# Altium PCB hub.PCBDOC
Units mm, origin at the board's own origin, x right, y up, seen from the top; angles counter-clockwise.
Board outline 100 x 104 mm, 2 copper layers (Top Layer, Bottom Layer); 58 components, 55 nets, 222 pads, 73 vias.
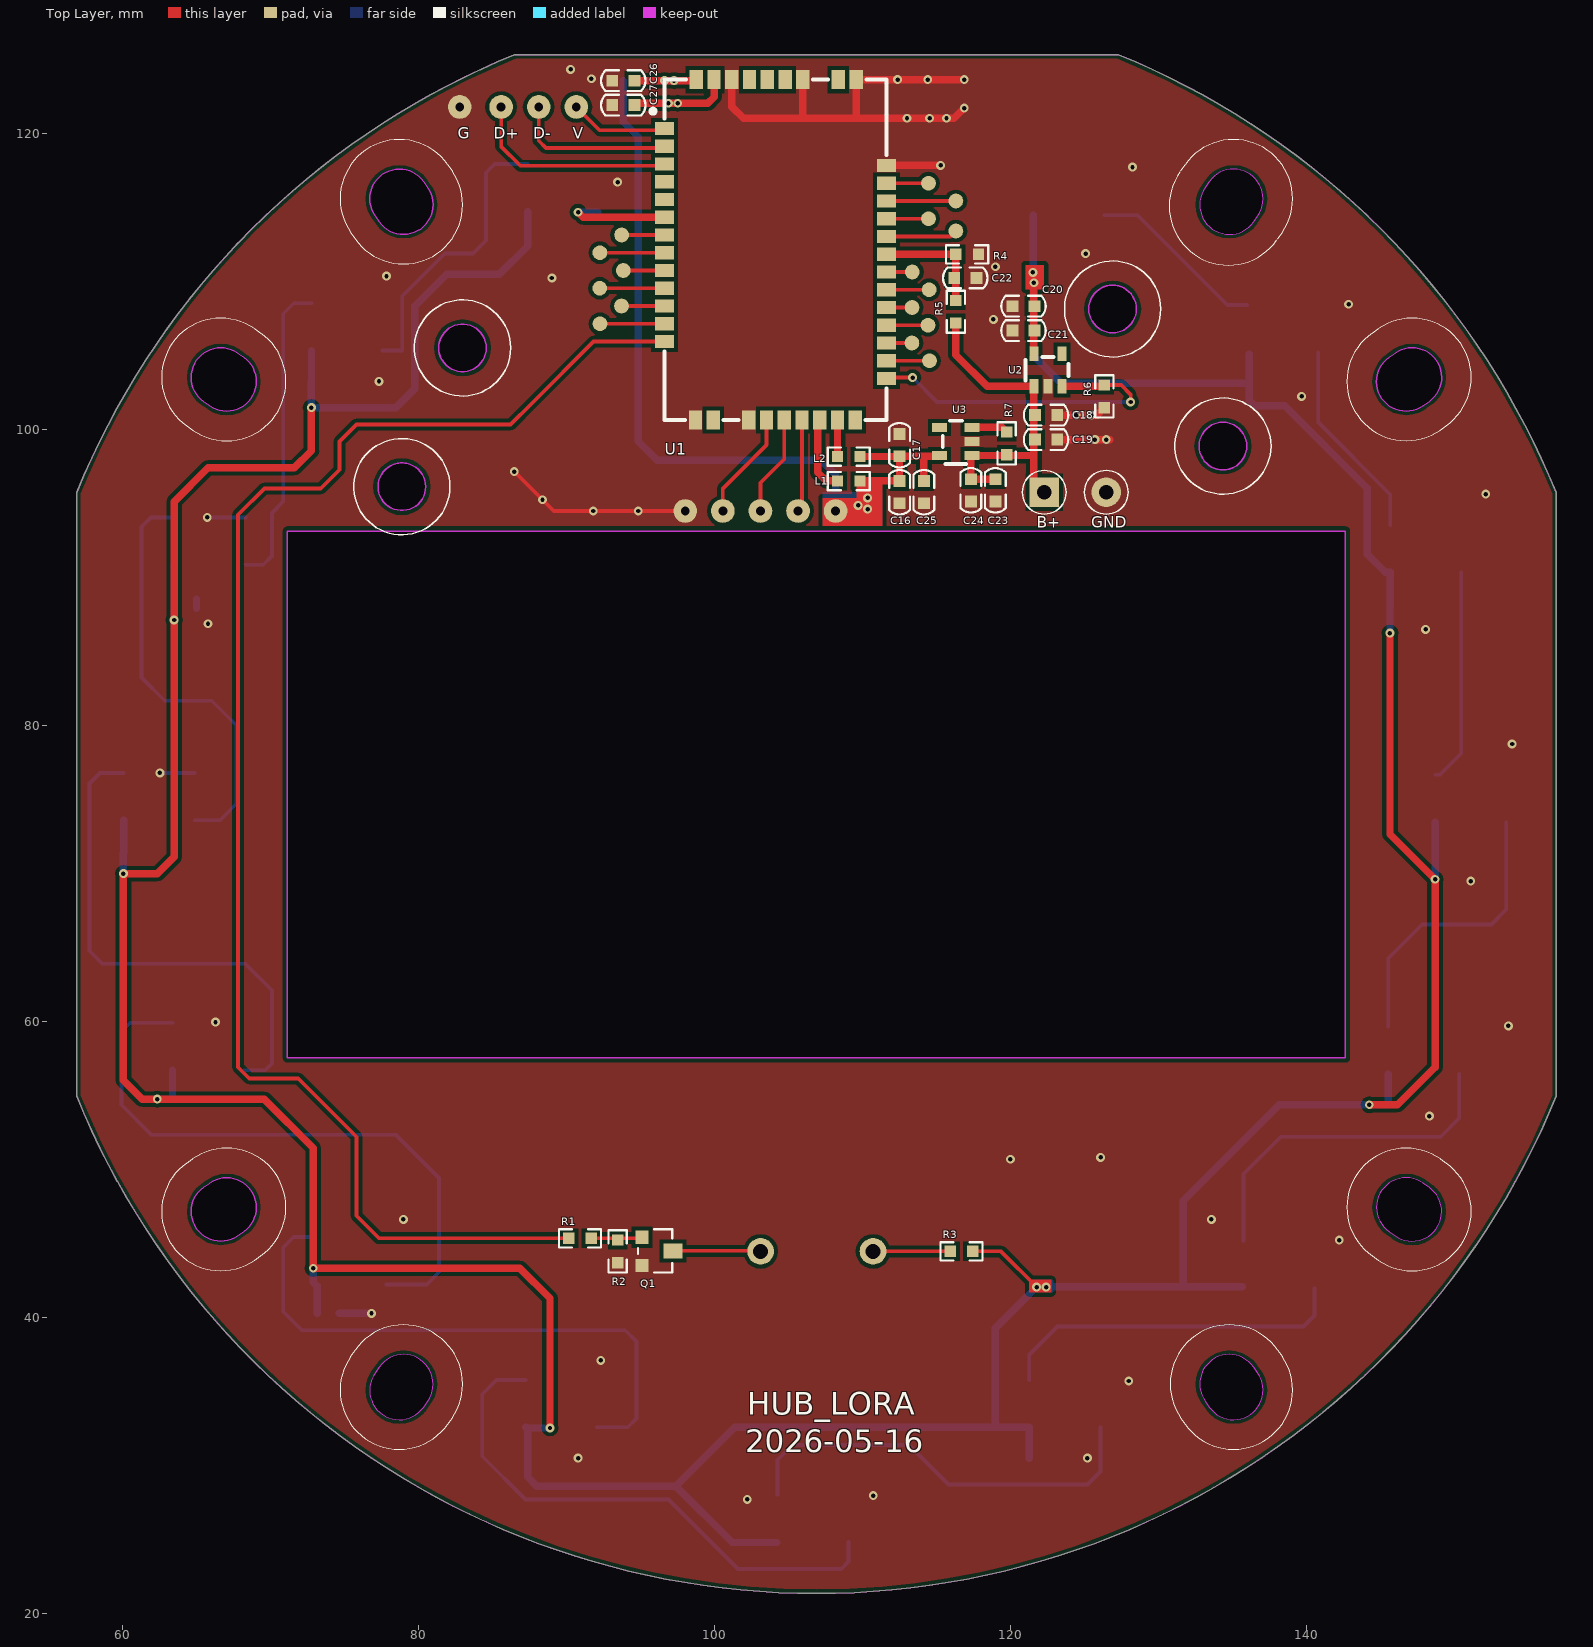
[diagram p0: Top Layer view]
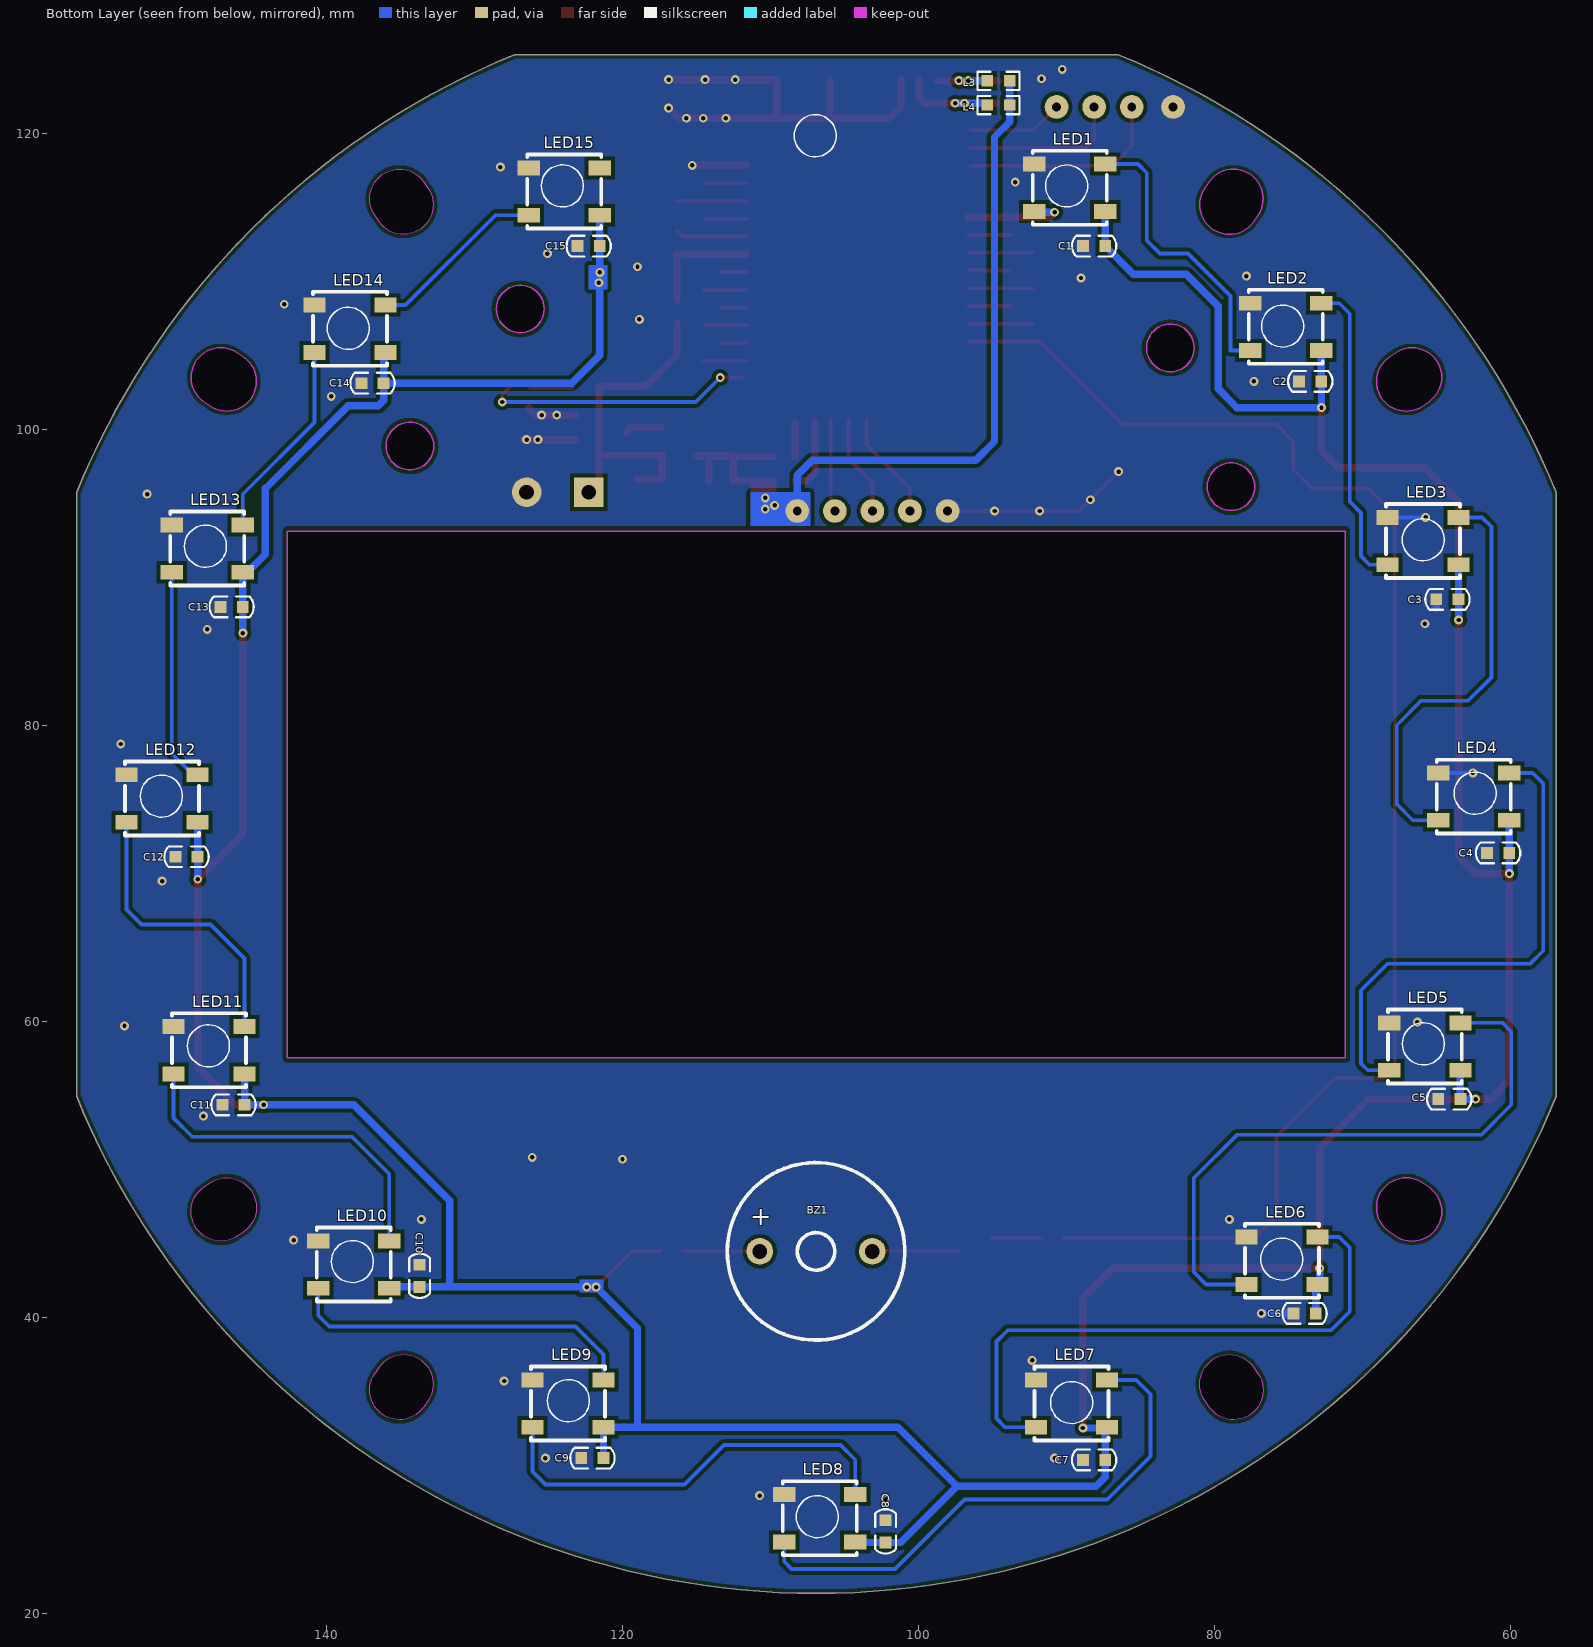
[diagram p1: Bottom Layer view, seen from below]

## Layer stack, top to bottom
Top Layer: signal copper 0.0356
Dielectric: dielectric 0.32, FR-4, Dk 4.8
Bottom Layer: signal copper 0.0356

## Board outline
56.908,54.938 ccw(c106.908,75.334) 156.908,54.938 156.908,95.73 ccw(c106.908,75.334) 127.304,125.334 86.512,125.334 86.51,125.333 ccw(c106.906,75.333) 56.906,95.729 56.908,95.73
cut-out: 71.156,57.533 71.156,93.133 142.656,93.133 142.656,57.533
cut-out: 147.905,101.599 cw(c146.758,103.238) 145.61,104.876 146.02,105.163 cw(c147.167,103.524) 148.314,101.886
cut-out: 133.172,116.332 ccw(c134.81,115.184) 136.448,114.037 136.735,114.447 ccw(c135.097,115.594) 133.458,116.741
cut-out: 77.363,114.038 77.076,114.447 cw(c78.715,115.594) 80.353,116.742 80.64,116.332 cw(c79.001,115.185)
cut-out: 145.61,45.79 146.019,45.503 ccw(c147.167,47.142) 148.314,48.78 147.904,49.067 ccw(c146.757,47.428)
cut-out: 133.172,34.334 133.459,33.925 ccw(c135.097,35.072) 136.735,36.219 136.449,36.629 ccw(c134.81,35.481)
cut-out: 77.076,36.219 ccw(c78.714,35.072) 80.352,33.924 80.639,34.334 ccw(c79.001,35.481) 77.363,36.628
cut-out: 65.907,101.599 65.497,101.886 cw(c66.644,103.524) 67.791,105.162 68.201,104.875 cw(c67.054,103.237)
cut-out: 82.986,103.899 cw(c82.986,105.508) 81.377,105.508 cw(c82.986,105.508) 82.986,107.118 cw(c82.986,105.508) 84.596,105.508 cw(c82.986,105.508)
cut-out: 78.889,94.523 cw(c78.889,96.133) 77.28,96.133 cw(c78.889,96.133) 78.889,97.743 cw(c78.889,96.133) 80.499,96.133 cw(c78.889,96.133)
cut-out: 132.77,98.878 ccw(c134.38,98.878) 134.38,97.268 ccw(c134.38,98.878) 135.99,98.878 ccw(c134.38,98.878) 134.38,100.487 ccw(c134.38,98.878)
cut-out: 125.312,108.142 ccw(c126.922,108.142) 126.922,106.533 ccw(c126.922,108.142) 128.531,108.142 ccw(c126.922,108.142) 126.922,109.752 ccw(c126.922,108.142)
cut-out: 67.792,45.504 cw(c66.645,47.142) 65.498,48.78 65.907,49.067 cw(c67.054,47.429) 68.201,45.79
cut-out: 67.792,45.504 cw(c66.645,47.142) 65.498,48.78 65.907,49.067 cw(c67.054,47.429) 68.201,45.79

## Design rules (kind name [scope] priority, off if disabled: settings)
Clearance [All] p1: gap=0.254
PlaneConnect [All] p1: planeconnectstyle=Direct reliefexpansion=0.508 reliefentries=4 reliefconductorwidth=0.254 reliefairgap=0.254
PolygonConnect [All] p1: connectstyle=Direct reliefconductorwidth=0.254 reliefentries=4 polygonreliefangle="90 Angle" airgapwidth=0.254
RoutingVias [All] p1: holewidth=0.711 width=1.27 viastyle="Through Hole" minholewidth=0.711 minwidth=1.27 maxholewidth=0.711 maxwidth=1.27
SilkscreenOverComponentPads SilkToSolderMaskClearance [IsPad] p1: minsilkscreentomaskgap=0.254
SolderMaskExpansion [All] p1: expansion=0.102
Width Width_1 [All] p1: maxlimit=0.254 minlimit=0.254 preferedwidth=0.254
Width [All] p2 off: maxlimit=0.5 minlimit=0.5 preferedwidth=0.5
26 further rules are at their usual default settings.

## Components (designator, comment, footprint, x,y, rotation, side; value= is the part's Value field where it differs from the comment)
BZ1 "BUZZ" BUZ-TH_BD12.0-P7.60-D0.6-FD 106.934,44.45 r180 bottom
C1 "0.1uF" C0603 88.138,112.395 r180 bottom
C2 "0.1uF" C0603 73.533,103.251 r180 bottom
C3 "0.1uF" C0603 64.262,88.519 r180 bottom
C4 "0.1uF" C0603 60.833,71.374 r180 bottom
C5 "0.1uF" C0603 64.135,54.737 r180 bottom
C6 "0.1uF" C0603 73.914,40.259 r180 bottom
C7 "0.1uF" C0603 88.138,30.353 r180 bottom
C8 "0.1uF" C0603 102.235,25.527 r270 bottom
C9 "0.1uF" C0603 122.047,30.48 r180 bottom
C10 "0.1uF" C0603 133.731,42.799 r270 bottom
C11 "0.1uF" C0603 146.304,54.356 r180 bottom
C12 "0.1uF" C0603 149.479,71.12 r180 bottom
C13 "0.1uF" C0603 146.431,88.011 r180 bottom
C14 "0.1uF" C0603 136.906,103.124 r180 bottom
C15 "0.1uF" C0603 122.301,112.395 r180 bottom
C16 "0.1uF" C0603 112.522,95.758 r90 top
C17 "0.1uF" C0603 112.522,98.933 r270 top
C18 "0.1uF" C0603 122.428,100.965 r180 top
C19 "0.1uF" C0603 122.428,99.314 r180 top
C20 "0.1uF" C0603 120.904,108.331 r0 top
C21 "0.1uF" C0603 120.904,106.68 r0 top
C22 "0.1uF" C0603 116.967,110.236 r0 top
C23 "0.1uF" C0603 118.999,95.885 r90 top
C24 "0.1uF" C0603 117.348,95.885 r90 top
C25 "0.1uF" C0603 114.173,95.758 r270 top
C26 "0.1uF" C0603 93.853,123.571 r180 top
C27 "0.1uF" C0603 93.853,121.92 r180 top
L1 "0R" COMPONENT_11 109.093,96.52 r90 top
L2 "0R" COMPONENT_11 109.093,98.171 r90 top
L3 "0R" COMPONENT_11 94.603,123.571 r90 bottom
L4 "0R" COMPONENT_11 94.603,121.92 r90 bottom
LED1 "LED-SMD_4P-L5.0-W5.0-LS5.4-TL_GL5050RGB01H-T" LED-SMD_4P-L5.0-W5.0-LS5.4-TL_GL5050RGB01H-T 89.789,116.332 r0 bottom
LED2 "LED-SMD_4P-L5.0-W5.0-LS5.4-TL_GL5050RGB01H-T" LED-SMD_4P-L5.0-W5.0-LS5.4-TL_GL5050RGB01H-T 75.184,106.934 r0 bottom
LED3 "LED-SMD_4P-L5.0-W5.0-LS5.4-TL_GL5050RGB01H-T" LED-SMD_4P-L5.0-W5.0-LS5.4-TL_GL5050RGB01H-T 65.913,92.456 r0 bottom
LED4 "LED-SMD_4P-L5.0-W5.0-LS5.4-TL_GL5050RGB01H-T" LED-SMD_4P-L5.0-W5.0-LS5.4-TL_GL5050RGB01H-T 62.484,75.184 r0 bottom
LED5 "LED-SMD_4P-L5.0-W5.0-LS5.4-TL_GL5050RGB01H-T" LED-SMD_4P-L5.0-W5.0-LS5.4-TL_GL5050RGB01H-T 65.786,58.293 r0 bottom
LED6 "LED-SMD_4P-L5.0-W5.0-LS5.4-TL_GL5050RGB01H-T" LED-SMD_4P-L5.0-W5.0-LS5.4-TL_GL5050RGB01H-T 75.438,43.815 r0 bottom
LED7 "LED-SMD_4P-L5.0-W5.0-LS5.4-TL_GL5050RGB01H-T" LED-SMD_4P-L5.0-W5.0-LS5.4-TL_GL5050RGB01H-T 89.662,34.163 r0 bottom
LED8 "LED-SMD_4P-L5.0-W5.0-LS5.4-TL_GL5050RGB01H-T" LED-SMD_4P-L5.0-W5.0-LS5.4-TL_GL5050RGB01H-T 106.68,26.416 r0 bottom
LED9 "LED-SMD_4P-L5.0-W5.0-LS5.4-TL_GL5050RGB01H-T" LED-SMD_4P-L5.0-W5.0-LS5.4-TL_GL5050RGB01H-T 123.698,34.163 r0 bottom
LED10 "LED-SMD_4P-L5.0-W5.0-LS5.4-TL_GL5050RGB01H-T" LED-SMD_4P-L5.0-W5.0-LS5.4-TL_GL5050RGB01H-T 138.176,43.561 r0 bottom
LED11 "LED-SMD_4P-L5.0-W5.0-LS5.4-TL_GL5050RGB01H-T" LED-SMD_4P-L5.0-W5.0-LS5.4-TL_GL5050RGB01H-T 147.955,58.039 r0 bottom
LED12 "LED-SMD_4P-L5.0-W5.0-LS5.4-TL_GL5050RGB01H-T" LED-SMD_4P-L5.0-W5.0-LS5.4-TL_GL5050RGB01H-T 151.13,75.057 r0 bottom
LED13 "LED-SMD_4P-L5.0-W5.0-LS5.4-TL_GL5050RGB01H-T" LED-SMD_4P-L5.0-W5.0-LS5.4-TL_GL5050RGB01H-T 148.082,91.948 r0 bottom
LED14 "LED-SMD_4P-L5.0-W5.0-LS5.4-TL_GL5050RGB01H-T" LED-SMD_4P-L5.0-W5.0-LS5.4-TL_GL5050RGB01H-T 138.43,106.807 r0 bottom
LED15 "LED-SMD_4P-L5.0-W5.0-LS5.4-TL_GL5050RGB01H-T" LED-SMD_4P-L5.0-W5.0-LS5.4-TL_GL5050RGB01H-T 123.952,116.078 r0 bottom
Q1 "8050" COMPONENT_14 96.266,44.45 r90 top
R1 "1K" COMPONENT_11 90.932,45.339 r90 top
R2 "10K" COMPONENT_11 93.472,44.45 r0 top
R3 "10K" COMPONENT_11 116.713,44.45 r90 top
R4 "10K" COMPONENT_11 117.094,111.841 r90 top
R5 "10K" COMPONENT_11 116.332,107.95 r180 top
R6 "10K" COMPONENT_11 126.365,102.235 r180 top
R7 "10K" COMPONENT_11 119.761,99.06 r180 top
U1 "COMM-SMD_44P-L23.0-W15.0-P1.20_RAK4630-8-SM-I" COMM-SMD_44P-L23.0-W15.0-P1.20_RAK4630-8-SM-I 104.14,112.141 r90 top
U2 "SOT-23-5_L2.9-W1.6-P0.95-LS2.8-BL" SOT-23-5_L2.9-W1.6-P0.95-LS2.8-BL 122.555,104.013 r0 top
U3 "SOT-23-5_L2.9-W1.6-P0.95-LS2.8-BL" SOT-23-5_L2.9-W1.6-P0.95-LS2.8-BL 116.332,99.187 r90 top

## Footprints (in the part's own frame and the unit in brackets; to place one, negate y for a bottom-side part, rotate by r counter-clockwise, add the part's x,y. Pads: shape width x height; smd on the part's side, far side on the other; paste and mask are expansions set on the pad)
BUZ-TH_BD12.0-P7.60-D0.6-FD [mm]
  round 1.801 hole 1.001: 1(-3.8,0) 2(3.8,0)
  silkscreen extent -6,-6 6,6
C0603 [mm]
  rect 0.8x0.8 smd mask+0.075: 1(0.75,0) 2(-0.75,0)
  silkscreen extent -1.5,-0.7 1.5,0.7
COMM-SMD_44P-L23.0-W15.0-P1.20_RAK4630-8-SM-I [mil]
  rect 35.4x51.2 smd: 1(322.9,295.2) 2(275.6,295.2) 3(228.4,295.2) 4(181.2,295.2) 5(133.9,295.2) 6(86.7,295.2) 7(39.4,295.2) 8(-7.8,295.2) 9(-55.1,295.2) 10(-102.3,295.2) 11(-149.6,295.2) 12(-196.8,295.2) 13(-244,295.2) 23(-342.5,-295.3) 24(-295.2,-295.3) 25(-248,-295.3) 26(-200.7,-295.3) 27(-153.5,-295.3) 28(-106.2,-295.3) 29(-59,-295.3) 30(-11.8,-295.3) 31(35.5,-295.3) 32(82.7,-295.3) 33(130,-295.3) 34(177.2,-295.3) 35(224.5,-295.3)
  rect 51.2x35.4 smd: 14(-452.7,213) 15(-452.7,165.7) 16(-452.7,71.2) 17(-452.7,24) 18(-452.7,-23.3) 19(-452.7,-70.5) 20(-452.7,-117.7) 21(-452.7,-165) 22(-452.7,-212.2) 36(452.8,-214.6) 37(452.8,-167.4) 38(452.8,-72.9) 39(452.8,-25.6) 40(452.8,21.6) 41(452.8,68.9) 42(452.8,116.1) 43(452.8,163.4) 44(452.8,210.6)
  silkscreen extent -453,-295 453,332
COMPONENT_11 [mil]
  rect 30x30 smd: 1(0,-30) 2(0,30)
  silkscreen extent -25,-56 24,56
COMPONENT_14 [mil]
  rect 35x35 smd: 1(37.5,45) 2(-37.5,45)
  rect 40x50 smd: 3(1.5,-37.5)
  silkscreen extent -56,-35 59,56
LED-SMD_4P-L5.0-W5.0-LS5.4-TL_GL5050RGB01H-T [mil]
  rect 59.1x39.4 smd paste+0 mask+2: 1(-94.5,63) 2(-94.5,-63) 3(94.5,-63) 4(94.5,63)
  silkscreen extent -98,-98 98,98
SOT-23-5_L2.9-W1.6-P0.95-LS2.8-BL [mm]
  rect 0.599x1.001 smd paste+0 mask+0.051: 1(-0.95,-1.1) 2(0,-1.1) 3(0.95,-1.1) 4(0.95,1.1) 5(-0.95,1.1)
  silkscreen extent -1.52,-0.7 1.4,0.89

## Part data
BZ1: library part SPEAKER
C1 C2 C3 C4 C5 C6 C7 C8 C9 C10 C11 C12 C13 C14 C15 C16 C17 C18 C19 C20 C21 C22 C23 C24 C25 C26 C27: library part Cap, "Capacitor"
L1 L2 L3 L4 R1 R2 R3 R4 R5 R6 R7: library part Res2, "Resistor"
LED1 LED2 LED3 LED4 LED5 LED6 LED7 LED8 LED9 LED10 LED11 LED12 LED13 LED14 LED15: library part Component_1
Q1: library part NPN, "NPN Bipolar Transistor"
U1: library part RAK4630-9-SM-I
U2 U3: library part U201

## Free pads (board coordinates)
  round 1.6 hole 0.6: 6(82.804,121.793) 6(85.598,121.793) 6(88.138,121.793) 6(90.678,121.793) 6(98.044,94.488) 6(100.584,94.488) 6(103.124,94.488) 6(105.664,94.488) 6(108.204,94.488)
  rect 2x2 hole 1: 8(122.301,95.758)
  round 2 hole 1: 9(126.492,95.758)
  round 1 smd: 10(93.741,113.142) 11(92.273,111.943) 12(93.856,110.741) 13(92.26,109.543) 14(93.736,108.341) 15(92.283,107.142) 16(114.483,116.642) 17(116.332,115.443) 18(114.485,114.242) 19(116.332,113.411) 20(113.386,110.642) 21(114.524,109.444) 22(113.373,108.242) 23(114.445,107.043) 24(113.36,105.842) 25(114.549,104.643)

## Via types
v1: diameter 0.6, hole 0.3, Top Layer to Bottom Layer, tented both sides, 73 vias

## Nets (pads, with @x,y where several pads share a name; then routed paths per layer and width w, separated by ;. In a path a pad name is that pad's centre, name@x,y a point inside that pad or via, vN(x,y) a via of type N, cw(c..) or ccw(c..) an arc to the next point about the centre after c; other vN are vias at no path point)
3.3V: C16.1 C17.1 C25.2 L1.1 L2.1 L3.1 L4.1 pad.6@108.204,94.488 U3.5 | length 56.2
  Top Layer w0.254: pad.6@108.204,94.488 109.982,94.488 109.982,96.393 L1.1
  Top Layer w0.5: L1.1 C16.1@112.51,96.52 ; L2.1 C17.1@112.256,98.171 ; C16.1 C17.1 U3.5@115.051,98.183 ; C25.2 114.173,98.056
  Bottom Layer w0.5: L3.1@93.853,123.571 93.853,120.777 94.869,119.761 94.869,99.187 96.139,97.917 107.188,97.917 108.204,96.901 pad.6@108.204,94.488
  other v1: 110.363,94.615 109.728,94.869 110.363,95.377
12V: BZ1.1 R3.2 | length 5.2
  Top Layer w0.254: BZ1.1 R3.2
D16: LED15.2
GND: C1.2 C2.2 C3.2 C4.2 C5.2 C6.2 C7.2 C8.2 C9.2 C10.2 C11.2 C12.2 C13.2 C14.2 C15.2 C16.2 C17.2 C18.2 C19.2 C20.2 C21.2 C22.1 C23.2 C24.2 C25.1 C26.1 C27.1 LED1.3 LED2.3 LED3.3 LED4.3 LED5.3 LED6.3 LED7.3 LED8.3 LED9.3 LED10.3 LED11.3 LED12.3 LED13.3 LED14.3 LED15.3 pad.6@82.804,121.793 pad.6@98.044,94.488 pad.9 Q1.2 R2.1 R4.1 R6.2 U1.14 U1.16 U1.35 U1.36 U1.38 U1.42 U2.2 U3.2 | length 61.5
  Top Layer w0.254: v1(86.487,97.155) 89.154,94.488 pad.6@98.044,94.488
  Top Layer w0.5: U1.42 101.191,121.821 101.981,121.031 116.205,121.031 v1(116.896,121.722) ; 105.992,121.084 U1.38 ; 109.591,121.168 U1.36 v1(116.896,123.642) ; U1.35 v1(115.303,117.843) ; C19.2 v1@126.746,99.314 ; C18.2 125.857,100.965 R6.2
  Bottom Layer w0.254: v1(62.535,76.784) LED4.3 ; v1(65.735,94.056) LED3.3
  Bottom Layer w0.5: 65.012,87.896 C3.2 ; C6.2 v1(76.835,40.259)
  other v1: 102.235,27.686 110.744,27.94 90.805,30.48 125.222,30.48 128.016,35.687 92.329,37.084 142.24,45.212 78.994,46.609 133.604,46.609 120.015,50.673 126.111,50.8 148.336,53.594 153.67,59.69 66.294,59.944 151.13,69.469 153.924,78.74 148.082,86.487 65.786,86.868 91.821,94.488 94.869,94.488 88.392,95.25 152.146,95.631 125.73,99.314 126.492,99.314 124.46,100.965 125.476,100.965 139.7,102.235 77.343,103.251 118.872,107.442 142.875,108.458 89.027,110.236 77.851,110.363 118.999,110.998 125.095,111.887 93.472,116.713 128.27,117.729 113.03,121.031 114.554,121.031 115.697,121.031 112.395,123.642 114.427,123.642 91.694,123.698 90.297,124.333
NetBZ1_2: BZ1.2 Q1.3 | length 5.9
  Top Layer w0.254: Q1.3 BZ1.2@103.096,44.488
NetC22_2: C22.2 R4.2 R5.1 U1.30 | length 7.8
  Top Layer w0.5: U1.30 R4.2 R5.1
NetC26_2: C26.2 L3.2 U1.44 | length 6
  Top Layer w0.5: C26.2 U1.44@98.72,123.571
  Bottom Layer w0.5: L3.2 v1(97.282,123.571)
  other v1: 96.647,123.571
NetC27_2: C27.2 L4.2 U1.43 | length 8.7
  Top Layer w0.5: C27.2@94.73,122.047 v1(96.901,122.047) v1(97.536,122.047) 99.568,122.047 99.99,122.469 U1.43
  Bottom Layer w0.5: L4.2@95.492,122.047 v1(96.901,122.047) v1(97.536,122.047)
NetL1_2: L1.2 U1.20 | length 5
  Top Layer w0.5: U1.20@107.003,100.515 107.003,97.086 107.569,96.52 L1.2
NetL2_2: L2.2 U1.21 | length 2.2
  Top Layer w0.5: L2.2 U1.21@108.331,100.388
NetLED1_2: LED1.2 LED2.4 | length 19.9
  Bottom Layer w0.254: LED2.4 78.918,105.334 78.918,109.017 81.788,111.887 83.693,111.887 84.582,112.776 84.582,117.348 85.166,117.932 LED1.2
NetLED1_4: LED1.4 U1.6 | length 7.6
  Top Layer w0.254: U1.6@96.431,114.3 U1.6@96.642,114.089
  Top Layer w0.5: v1(90.805,114.681) 91.143,114.343 U1.6
  Bottom Layer w0.5: v1(90.805,114.681) LED1.4@92.138,114.681
NetLED2_2: LED2.2 LED3.4 | length 20.9
  Bottom Layer w0.254: LED3.4 69.52,90.856 70.104,91.44 70.104,94.361 70.866,95.123 70.866,107.823 71.577,108.534 LED2.2
NetLED3_2: LED3.2 LED4.4 | length 29
  Bottom Layer w0.254: LED3.2 61.925,94.056 61.29,93.421 61.29,83.236 62.865,81.661 66.04,81.661 67.691,80.01 67.691,74.676 66.599,73.584 LED4.4
NetLED4_2: LED4.2 LED5.4 | length 34.4
  Bottom Layer w0.254: LED4.2 58.496,76.784 57.785,76.073 57.785,64.77 58.674,63.881 68.326,63.881 70.104,62.103 70.104,57.15 69.647,56.693 LED5.4
NetLED5_2: LED5.2 LED6.4 | length 42.4
  Bottom Layer w0.254: LED5.2 60.528,59.893 59.944,59.309 59.944,54.356 61.976,52.324 78.486,52.324 81.407,49.403 81.407,43.053 80.569,42.215 LED6.4
NetLED6_2: LED6.2 LED7.4 | length 39.6
  Bottom Layer w0.254: LED6.2 71.577,45.415 70.866,44.704 70.866,40.386 72.136,39.116 93.98,39.116 94.742,38.354 94.742,33.147 94.158,32.563 LED7.4
NetLED7_2: LED7.2 LED8.4 | length 37
  Bottom Layer w0.254: LED7.2 85.293,35.763 84.328,34.798 84.328,30.607 87.249,27.686 96.901,27.686 101.6,22.987 108.585,22.987 109.08,23.482 LED8.4
NetLED8_2: LED8.2 LED9.4 | length 29
  Bottom Layer w0.254: LED8.2 104.28,30.366 105.283,31.369 113.157,31.369 115.824,28.702 125.222,28.702 126.098,29.578 LED9.4
NetLED9_2: LED9.2 LED10.4 | length 23.9
  Bottom Layer w0.254: LED9.2 121.298,37.478 123.19,39.37 139.827,39.37 140.576,40.119 LED10.4
NetLED10_2: LED10.2 LED11.4 | length 23.6
  Bottom Layer w0.254: LED10.2 135.776,49.67 138.303,52.197 149.098,52.197 150.355,53.454 LED11.4
NetLED11_2: LED11.2 LED12.4 | length 19.9
  Bottom Layer w0.254: LED11.2 145.555,64.249 147.853,66.548 152.527,66.548 153.53,67.551 LED12.4
NetLED12_2: LED12.2 LED13.4 | length 14.6
  Bottom Layer w0.254: LED12.2 149.047,76.657 150.482,78.092 LED13.4
NetLED13_2: LED13.2 LED14.4 | length 13.7
  Bottom Layer w0.254: LED14.4 140.83,100.47 145.682,95.618 LED13.2
NetLED14_2: LED14.2 LED15.4 | length 12.2
  Bottom Layer w0.254: LED15.4 128.6,114.478 134.671,108.407 LED14.2
NetQ1_1: Q1.1 R1.1 R2.2 | length 3.4
  Top Layer w0.254: R1.1 Q1.1@95.06,45.339
NetR1_2: R1.2 U1.13 | length 102.4
  Top Layer w0.254: R1.2 77.343,45.339 75.819,46.863 75.819,52.197 71.882,56.134 68.58,56.134 67.818,56.896 67.818,94.234 69.596,96.012 73.406,96.012 74.676,97.282 74.676,99.187 75.819,100.33 86.233,100.33 87.662,101.759 91.846,105.943 U1.13
NetR6_1: R6.1 U1.23 U2.3 | length 22.2
  Top Layer w0.254: U1.23@111.887,103.505 113.343,103.505 v1(113.411,103.505) ; R6.1 127.508,102.997 128.143,102.362 v1(128.143,101.854)
  Top Layer w0.5: U2.3 R6.1@126.195,102.913
  Bottom Layer w0.254: v1(113.411,103.505) 115.062,101.854 v1(128.143,101.854)
NetR7_1: R7.1 U3.3 | length 2.5
  Top Layer w0.5: U3.3 119.446,100.137 R7.1
NetU1_1: pad.6@90.678,121.793 U1.1 | length 6.5
  Top Layer w0.254: pad.6@90.678,121.793 92.255,120.216 U1.1@96.515,120.216
NetU1_2: pad.6@88.138,121.793 U1.2 | length 10.9
  Top Layer w0.254: pad.6@88.138,121.793 88.138,119.507 88.631,119.014 U1.2@96.515,119.014
NetU1_3: pad.6@85.598,121.793 U1.3 | length 14.1
  Top Layer w0.254: pad.6@85.598,121.793 85.598,119.126 86.909,117.815 U1.3@96.515,117.815
NetU1_17: pad.6@100.584,94.488 U1.17 | length 7.4
  Top Layer w0.254: pad.6@100.584,94.488 100.584,96.012 103.53,98.958 U1.17
NetU1_18: pad.6@103.124,94.488 U1.18 | length 6.8
  Top Layer w0.254: pad.6@103.124,94.488 103.124,96.393 104.732,98.001 U1.18
NetU1_19: pad.6@105.664,94.488 U1.19 | length 6.3
  Top Layer w0.254: pad.6@105.664,94.488 105.931,94.755 U1.19
RF_BT: U1.15
RF_LORA: U1.37
U1-7: pad.10 U1.7 | length 2.9
  Top Layer w0.254: pad.10 U1.7
U1-8: pad.11 U1.8 | length 4.4
  Top Layer w0.254: pad.11 U1.8
U1-9: pad.12 U1.9 | length 2.8
  Top Layer w0.254: pad.12 U1.9
U1-10: pad.13 U1.10 | length 4.4
  Top Layer w0.254: pad.13 U1.10
U1-11: pad.14 U1.11 | length 2.9
  Top Layer w0.254: pad.14 U1.11
U1-12: pad.15 U1.12 | length 4.4
  Top Layer w0.254: pad.15 U1.12
U1-24: pad.25 U1.24 | length 2.9
  Top Layer w0.254: U1.24 pad.25
U1-25: pad.24 U1.25 | length 1.7
  Top Layer w0.254: U1.25 pad.24
U1-26: pad.23 U1.26 | length 2.8
  Top Layer w0.254: U1.26 pad.23
U1-27: pad.22 U1.27 | length 1.7
  Top Layer w0.254: U1.27 pad.22
U1-28: pad.21 U1.28 | length 2.9
  Top Layer w0.254: U1.28 pad.21
U1-29: pad.20 U1.29 | length 1.7
  Top Layer w0.254: U1.29 pad.20
U1-31: pad.19 U1.31 | length 4.8
  Top Layer w0.254: U1.31 115.964,113.043 pad.19
U1-32: pad.18 U1.32 | length 2.8
  Top Layer w0.254: U1.32 pad.18
U1-33: pad.17 U1.33 | length 4.7
  Top Layer w0.254: U1.33 pad.17
U1-34: pad.16 U1.34 | length 2.8
  Top Layer w0.254: U1.34 pad.16
VBAT: C18.1 C19.1 C23.1 C24.1 pad.8 R5.2 R7.2 U2.1 U3.1 | length 23.2
  Top Layer w0.5: R5.2 116.332,105.029 118.448,102.913 U2.1 121.605,96.454 pad.8 pad.8@122.367,95.824 ; C24.1 U3.1@117.348,98.28 ; U3.1 121.539,98.237
  Top Layer w0.508: C24.1 C23.1
VDD5: C1.1 C2.1 C3.1 C4.1 C5.1 C6.1 C7.1 C8.1 C9.1 C10.1 C11.1 C12.1 C13.1 C14.1 C15.1 C20.1 C21.1 LED1.1 LED2.1 LED3.1 LED4.1 LED5.1 LED6.1 LED7.1 LED8.1 LED9.1 LED10.1 LED11.1 LED12.1 LED13.1 LED14.1 LED15.1 R3.1 U2.5 | length 345.1
  Top Layer w0.254: R3.1 119.38,44.45 v1(121.793,42.037)
  Top Layer w0.5: v1(72.771,101.473) 72.771,98.576 72.783,98.564 71.628,97.409 65.786,97.409 63.5,95.123 v1(63.5,87.122) 63.5,71.12 62.357,69.977 v1(60.071,69.977) 60.071,56.007 61.341,54.737 v1(62.357,54.737) 69.596,54.737 72.898,51.435 v1(72.898,43.307) 86.868,43.307 88.9,41.275 v1(88.9,32.512) ; U2.5 v1(121.605,109.916) ; v1(144.272,54.356) 146.177,54.356 148.717,56.896 v1(148.717,69.596) 145.669,72.644 v1(145.669,86.233)
  Bottom Layer w0.5: v1(60.071,69.977) C4.1@60.071,71.362 ; C4.1 LED4.1 ; v1(62.357,54.737) C5.1 LED5.1 ; v1(63.5,87.122) 63.5,88.507 C3.1 LED3.1 ; LED2.1 C2.1 72.771,103.239 v1(72.771,101.473) 78.486,101.473 79.756,102.743 79.756,108.331 81.915,110.49 85.483,110.49 C1.1 LED1.1 ; v1(72.898,43.307) 72.898,42.355 LED6.1 ; C6.1 LED6.1@73.164,42.089 ; LED7.1 87.312,32.512 v1(88.9,32.512) ; LED7.1@87.388,32.437 C7.1 87.388,29.198 88.011,28.575 97.409,28.575 ; LED8.1@104.241,24.777 C8.1 101.207,24.777 97.409,28.575 ; C9.1 LED9.1 ; LED9.1 118.999,32.563 ; LED15.1 C15.1 121.551,105.017 123.444,103.124 C14.1 ; LED10.1@135.688,42.049 C10.1 131.699,42.049 ; LED14.1@136.156,105.081 C14.1 ; LED11.1 C11.1 v1(144.272,54.356) 138.176,54.356 131.699,47.879 131.699,42.049 ; v1(145.669,86.233) C13.1@145.669,87.999 ; C13.1 LED13.1 ; LED13.1 145.364,90.348 144.145,91.567 144.145,96.012 138.557,101.6 136.525,101.6 136.156,101.969 C14.1 ; v1(148.717,69.596) C12.1@148.717,71.108 ; C12.1 LED12.1 ; 97.409,28.575 101.397,32.563 118.999,32.563 ; 118.999,32.563 118.999,39.243 121.805,42.049 131.699,42.049
  other v1: 122.428,42.037 121.539,110.617
pads on no net: U1.4 U1.5 U1.22 U1.39 U1.40 U1.41 U2.4 U3.4

## Polygon pours and split planes (outlines as drawn)
GND on Top Layer "Bottom Layer-No Net" (solid, remove dead copper, pour order 4): 56.908,54.938 56.908,95.73 56.908,102.12 78.232,123.444 80.137,125.349 84.074,125.349 127.289,125.349 127.304,125.334 127.32,125.349 134.366,125.349 134.366,125.222 148.336,111.252 156.908,102.68 156.908,95.73 156.908,54.938 156.718,54.748 156.718,48.514 156.718,48.133 140.081,31.496 129.667,21.082 102.743,21.082 81.915,21.082 56.769,46.228 56.908,46.367 56.908,54.991
GND on Bottom Layer "Bottom Layer-No Net" (solid, remove dead copper, pour order 8): 56.908,54.938 56.769,54.798 56.769,48.26 77.724,27.305 83.566,21.463 102.743,21.463 130.048,21.463 149.479,40.894 157.226,48.641 157.226,59.309 157.226,101.473 133.223,125.476 133.096,125.603 77.851,125.603 76.454,125.603 56.769,105.918 56.908,105.779 56.908,54.938

## Keep-outs
Keep-Out Layer:
  circle w0.1: c78.889,96.133 r1.61
  circle w0.1: c82.986,105.508 r1.61
  circle w0.1: c126.922,108.142 r1.61
  circle w0.1: c134.38,98.878 r1.61
  pour cut-out: 77.363,114.038 77.076,114.447 cw(c78.715,115.594) 80.353,116.742 80.64,116.332 cw(c79.001,115.185)
  lines w0.013: 65.497,101.886 cw(c66.644,103.524) 67.791,105.162 68.201,104.875 cw(c67.054,103.237) 65.907,101.599 65.497,101.886 ; 65.498,48.78 ccw(c66.645,47.142) 67.792,45.504 68.201,45.79 ccw(c67.054,47.429) 65.907,49.067 65.498,48.78 ; 77.076,36.219 ccw(c78.714,35.072) 80.352,33.924 80.639,34.334 ccw(c79.001,35.481) 77.363,36.628 77.076,36.219 ; 77.076,114.447 cw(c78.715,115.594) 80.353,116.742 80.64,116.332 cw(c79.001,115.185) 77.363,114.038 77.076,114.447 ; 133.172,116.332 ccw(c134.81,115.184) 136.448,114.037 136.735,114.447 ccw(c135.097,115.594) 133.458,116.741 133.172,116.332 ; 133.172,34.334 cw(c134.81,35.481) 136.449,36.629 136.735,36.219 cw(c135.097,35.072) 133.459,33.925 133.172,34.334 ; 145.61,45.79 cw(c146.757,47.428) 147.904,49.067 148.314,48.78 cw(c147.167,47.142) 146.019,45.503 145.61,45.79 ; 145.61,104.876 ccw(c146.758,103.238) 147.905,101.599 148.314,101.886 ccw(c147.167,103.524) 146.02,105.163 145.61,104.876
  lines w0.05: 56.906,95.729 cw(c106.906,75.333) 86.51,125.333 ; 56.908,95.73 56.908,54.938 ccw(c106.908,75.334) 156.908,54.938 156.908,95.73 ccw(c106.908,75.334) 127.304,125.334 86.512,125.334
  lines w0.1: 71.156,57.533 142.656,57.533 142.656,93.133 71.156,93.133 71.156,57.533

## Other copper
Top Layer:
  rectangle net VDD5: 121.031,109.474 122.301,111.125
  rectangle net 3.3V: 109.601,93.726 111.379,96.647
  rectangle net 3.3V: 107.315,93.472 111.379,95.377
  rectangle net VDD5: 121.285,41.656 122.809,42.545
Bottom Layer:
  rectangle net VDD5: 121.031,109.474 122.301,111.125
  rectangle net 3.3V: 107.315,93.472 111.379,95.758
  rectangle net VDD5: 121.285,41.656 122.936,42.545

## Silkscreen, mask and mechanical layers (free items; w line width, h text height)
Top Overlay:
  circle w0.1: c134.38,98.878 r3.25
  circle w0.1: c126.922,108.142 r3.25
  circle w0.1: c82.986,105.508 r3.25
  circle w0.1: c78.889,96.133 r3.25
  circle w0.1: c122.301,95.758 r1.481
  circle w0.1: c126.492,95.758 r1.481
  lines w0.05: 131.476,117.395 ccw(c134.752,115.1) 138.029,112.806 ; 131.533,117.479 131.82,117.888 cw(c135.097,115.594) 138.373,113.3 138.086,112.89 ; 64.35,100.247 cw(c66.644,103.524) 68.938,106.801 69.348,106.514 cw(c67.054,103.237) 64.759,99.961 64.35,100.247 ; 64.35,50.419 ccw(c66.645,47.142) 68.939,43.865 69.349,44.152 ccw(c67.054,47.429) 64.76,50.705 64.35,50.419 ; 75.438,37.366 ccw(c78.714,35.072) 81.991,32.777 82.278,33.187 ccw(c79.001,35.481) 75.724,37.775 75.438,37.366 ; 75.438,113.3 cw(c78.715,115.594) 81.991,117.889 82.278,117.479 cw(c79.001,115.185) 75.725,112.891 75.438,113.3 ; 131.534,33.187 cw(c134.81,35.482) 138.087,37.776 138.374,37.366 cw(c135.097,35.072) 131.821,32.778 131.534,33.187 ; 144.463,44.152 cw(c146.757,47.428) 149.051,50.705 149.461,50.418 cw(c147.167,47.142) 144.872,43.865 144.463,44.152 ; 144.463,106.514 ccw(c146.758,103.238) 149.052,99.961 149.461,100.248 ccw(c147.167,103.524) 144.873,106.801 144.463,106.514
  text "G" at 82.677,119.634 h0.76
  text "D+" at 85.09,119.634 h0.76
  text "D-" at 87.757,119.634 h0.76
  text "V" at 90.424,119.634 h0.76
  text "B+" at 121.793,93.345 h0.76
  text "GND" at 125.476,93.345 h0.76
  text "HUB_LORA" at 102.235,33.401 h1.52
  text "2026-05-16" at 102.108,30.861 h1.52
Bottom Overlay:
  circle w0.1: c106.857,26.522 r1.422
  circle w0.1: c123.668,34.36 r1.422
  circle w0.1: c138.266,43.762 r1.422
  circle w0.1: c147.993,58.342 r1.422
  circle w0.1: c151.177,75.22 r1.422
  circle w0.1: c148.197,92.111 r1.422
  circle w0.1: c138.547,106.832 r1.422
  circle w0.1: c124.074,116.462 r1.422
  circle w0.1: c106.987,119.853 r1.422
  circle w0.1: c89.996,116.458 r1.422
  circle w0.1: c75.403,106.985 r1.422
  circle w0.1: c65.898,92.543 r1.422
  circle w0.1: c62.392,75.418 r1.422
  circle w0.1: c65.885,58.477 r1.422
  circle w0.1: c75.456,43.929 r1.422
  circle w0.1: c89.662,34.233 r1.422

## Text inside footprints (layer, text, board x,y; h text height)
BZ1: Bottom Overlay "+" at 111.379,46.215 h1.27